# Altium PCB PCB1.PcbDoc (part 3 of 3)
Units mil, origin at the board's own origin, x right, y up, seen from the top; angles counter-clockwise.
Board outline 2780 x 2325 mil, 2 copper layers (Top Layer, Bottom Layer); 78 components, 66 nets, 284 pads, 83 vias.
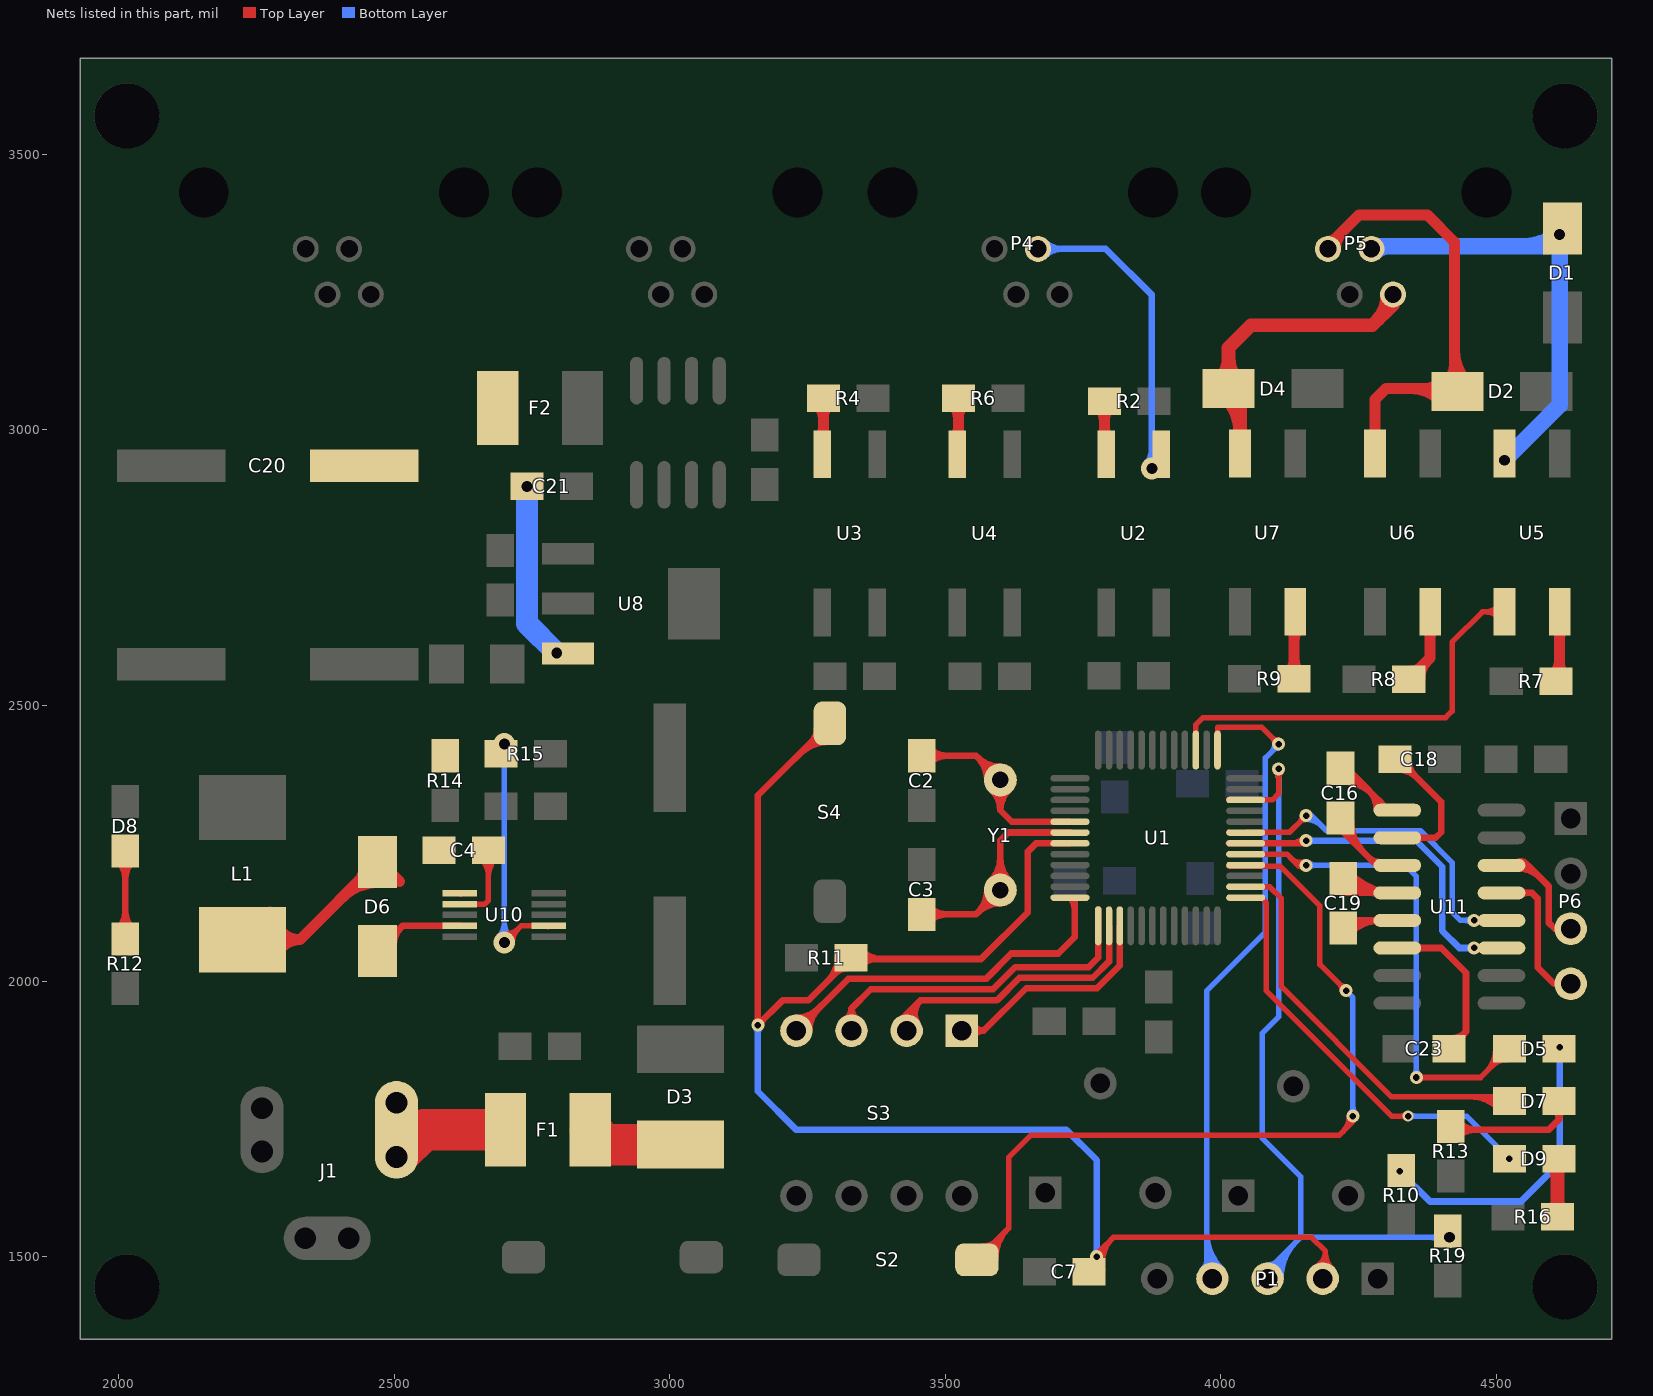
[diagram p3: the nets of this part, all layers, seen from the top]

## Via types
v1: diameter 39.37, hole 19.68, Top Layer to Bottom Layer, 56 vias
v2: diameter 23.62, hole 11.81, Top Layer to Bottom Layer, 18 vias
v3: diameter 19.68, hole 11.81, Top Layer to Bottom Layer, 8 vias
v4: diameter 23.62, hole 11.81, Top Layer to Bottom Layer, tented bottom, 1 vias

## Nets (pads, with @x,y where several pads share a name; then routed paths per layer and width w, separated by ;. In a path a pad name is that pad's centre, name@x,y a point inside that pad or via, vN(x,y) a via of type N, cw(c..) or ccw(c..) an arc to the next point about the centre after c; other vN are vias at no path point) (continued)
KEY2: S2.1 U1.28 | length 2150.2
  Top Layer w10: S2.1@3557.61,1494.12 3615,1551.5 ; U1.28@4015,2208.7 4107.63,2208.7 4180,2136.33 4180,2030 v2(4227.5,1982.5) ; v2(4240,1755) 4240,1745 4215,1720 3655,1720 3615,1680 3615,1551.5 ; S2.1@3567.46,1518.65 ccw(c3567.46,1554.1) 3592.53,1529.03 ; S2.1@3567.46,1518.65 ccw(c3567.46,1554.1) 3592.53,1529.03 ; S2.1@3567.46,1518.65 ccw(c3567.46,1554.1) 3592.53,1529.03 ; S2.1@3581.98,1494.37 cw(c3637.84,1495.34) 3598.34,1534.84 ; S2.1@3581.98,1494.37 cw(c3637.84,1495.34) 3598.34,1534.84 ; S2.1@3581.98,1494.37 cw(c3637.84,1495.34) 3598.34,1534.84 ; S2.1@3591.98,1494.54 cw(c3670.59,1495.91) 3615,1551.5 ; S2.1@3591.98,1494.54 cw(c3670.59,1495.91) 3615,1551.5 ; S2.1@3591.98,1494.54 cw(c3670.59,1495.91) 3615,1551.5 ; U1.28@4075.47,2211.11 ccw(c4081.32,2216.96) 4081.32,2208.69 ; U1.28@4075.47,2211.11 ccw(c4081.32,2216.96) 4081.32,2208.69 ; U1.28@4075.47,2211.11 ccw(c4081.32,2216.96) 4081.32,2208.69 ; 4215.87,1994.13 cw(c4204.25,1982.5) v2@4220.69,1982.5 ; 4215.87,1994.13 ccw(c4227.5,2005.75) v2@4227.5,1989.31 ; 4215.87,1994.13 ccw(c4227.5,2005.75) v2@4227.5,1989.31 ; 4215.87,1994.13 cw(c4204.25,1982.5) v2@4220.69,1982.5 ; 4215.87,1994.13 ccw(c4227.5,2005.75) v2@4227.5,1989.31 ; 4215.87,1994.13 cw(c4204.25,1982.5) v2@4220.69,1982.5 ; 4221.3,1726.3 ccw(c4192.6,1755) v2@4233.19,1755 ; 4221.3,1726.3 ccw(c4192.6,1755) v2@4233.19,1755 ; 4221.3,1726.3 ccw(c4192.6,1755) v2@4233.19,1755
  Bottom Layer w10: v2(4227.5,1982.5) 4240,1970 v2(4240,1755) ; v2@4235.18,1759.82 ccw(c4223.56,1771.44) 4240,1771.44 ; v2@4235.18,1759.82 ccw(c4223.56,1771.44) 4240,1771.44 ; v2@4235.18,1759.82 ccw(c4223.56,1771.44) 4240,1771.44 ; 4240,1771.44 ccw(c4256.44,1771.44) v2@4244.82,1759.82 ; 4240,1771.44 ccw(c4256.44,1771.44) v2@4244.82,1759.82 ; 4240,1771.44 ccw(c4256.44,1771.44) v2@4244.82,1759.82
LED1: D5.2 U1.29 | length 1672.1
  Top Layer w10: 4091.17,2230.16 4015,2230 4119.84,2230.16 4140,2210 v2@4150,2210 ; v4(4355,1825) 4471.55,1825 D5.2@4523.86,1877.31 ; 4127.34,2222.66 ccw(c4145.18,2240.5) v2@4152.91,2216.48 ; 4127.34,2222.66 ccw(c4145.18,2240.5) v2@4152.91,2216.48 ; 4127.34,2222.66 ccw(c4145.18,2240.5) v2@4152.91,2216.48 ; 4138.92,2211.09 ccw(c4150.82,2222.99) v2@4155.98,2206.96 ; 4138.92,2211.09 ccw(c4150.82,2222.99) v2@4155.98,2206.96 ; 4138.92,2211.09 ccw(c4150.82,2222.99) v2@4155.98,2206.96 ; v4@4359.82,1820.18 cw(c4371.44,1808.56) 4371.44,1825 ; v4@4359.82,1820.18 cw(c4371.44,1808.56) 4371.44,1825 ; v4@4359.82,1820.18 cw(c4371.44,1808.56) 4371.44,1825 ; v4@4359.82,1829.82 ccw(c4371.44,1841.44) 4371.44,1825 ; v4@4359.82,1829.82 ccw(c4371.44,1841.44) 4371.44,1825 ; v4@4359.82,1829.82 ccw(c4371.44,1841.44) 4371.44,1825 ; 4481.18,1834.64 ccw(c4438.5,1877.31) D5.2@4498.86,1877.31 ; 4481.18,1834.64 ccw(c4438.5,1877.31) D5.2@4498.86,1877.31 ; 4481.18,1834.64 ccw(c4438.5,1877.31) D5.2@4498.86,1877.31 ; 4493.25,1846.71 cw(c4518.86,1821.1) D5.2@4518.86,1857.31 ; 4493.25,1846.71 cw(c4518.86,1821.1) D5.2@4518.86,1857.31 ; 4493.25,1846.71 cw(c4518.86,1821.1) D5.2@4518.86,1857.31 ; 4498.25,1851.71 ccw(c4472.65,1877.31) D5.2@4508.86,1877.31 ; 4498.25,1851.71 ccw(c4472.65,1877.31) D5.2@4508.86,1877.31 ; 4498.25,1851.71 ccw(c4472.65,1877.31) D5.2@4508.86,1877.31
  Bottom Layer w10: v2@4150,2210 v2(4155,2210) 4335,2210 4355,2190 v4(4355,1825) ; v2@4159.82,2205.18 cw(c4171.44,2193.56) 4171.44,2210 ; v2@4159.82,2205.18 cw(c4171.44,2193.56) 4171.44,2210 ; v2@4159.82,2205.18 cw(c4171.44,2193.56) 4171.44,2210 ; v2@4159.82,2214.82 ccw(c4171.44,2226.44) 4171.44,2210 ; v2@4159.82,2214.82 ccw(c4171.44,2226.44) 4171.44,2210 ; v2@4159.82,2214.82 ccw(c4171.44,2226.44) 4171.44,2210 ; v4@4350.18,1829.82 ccw(c4338.56,1841.44) 4355,1841.44 ; v4@4350.18,1829.82 ccw(c4338.56,1841.44) 4355,1841.44 ; v4@4350.18,1829.82 ccw(c4338.56,1841.44) 4355,1841.44 ; 4355,1841.44 ccw(c4371.44,1841.44) v4@4359.82,1829.82 ; 4355,1841.44 ccw(c4371.44,1841.44) v4@4359.82,1829.82 ; 4355,1841.44 ccw(c4371.44,1841.44) v4@4359.82,1829.82
LED2: D7.2 U1.26 | length 1109.9
  Top Layer w10: U1.26@4015,2171.1 4088.9,2171.1 4110,2150 4110,1990 4310,1790 4516.17,1790 D7.2@4523.86,1782.31 ; 4452.02,1790 cw(c4452.02,1715.47) D7.2@4504.72,1768.17 ; 4452.02,1790 cw(c4452.02,1715.47) D7.2@4504.72,1768.17 ; 4452.02,1790 cw(c4452.02,1715.47) D7.2@4504.72,1768.17 ; 4476.16,1790 cw(c4476.16,1739.61) D7.2@4511.79,1775.24 ; 4476.16,1790 cw(c4476.16,1739.61) D7.2@4511.79,1775.24 ; 4476.16,1790 cw(c4476.16,1739.61) D7.2@4511.79,1775.24 ; 4489.13,1790 ccw(c4489.13,1812.04) D7.2@4504.72,1796.45 ; 4489.13,1790 ccw(c4489.13,1812.04) D7.2@4504.72,1796.45 ; 4489.13,1790 ccw(c4489.13,1812.04) D7.2@4504.72,1796.45
LED3: D9.2 U1.25 | length 933.9
  Top Layer w10: U1.25@4045.31,2151.42 4073.58,2151.42 4083,2142 4083,1982 4310,1755 v3(4340,1755) ; 4328.31,1755 cw(c4328.31,1743.31) v3@4336.58,1751.58 ; 4328.31,1755 ccw(c4328.31,1766.69) v3@4336.58,1758.42 ; 4328.31,1755 ccw(c4328.31,1766.69) v3@4336.58,1758.42 ; 4328.31,1755 cw(c4328.31,1743.31) v3@4336.58,1751.58 ; 4328.31,1755 ccw(c4328.31,1766.69) v3@4336.58,1758.42 ; 4328.31,1755 cw(c4328.31,1743.31) v3@4336.58,1751.58
  Bottom Layer w10: v3(4340,1755) 4446.17,1755 v3(4523.86,1677.31) ; v3@4343.42,1751.58 cw(c4351.69,1743.31) 4351.69,1755 ; v3@4343.42,1751.58 cw(c4351.69,1743.31) 4351.69,1755 ; v3@4343.42,1751.58 cw(c4351.69,1743.31) 4351.69,1755 ; v3@4343.42,1758.42 ccw(c4351.69,1766.69) 4351.69,1755 ; v3@4343.42,1758.42 ccw(c4351.69,1766.69) 4351.69,1755 ; v3@4343.42,1758.42 ccw(c4351.69,1766.69) 4351.69,1755 ; 4515.59,1685.58 cw(c4507.32,1677.31) v3@4519.02,1677.31 ; 4515.59,1685.58 ccw(c4523.86,1693.85) v3@4523.86,1682.16 ; 4515.59,1685.58 ccw(c4523.86,1693.85) v3@4523.86,1682.16 ; 4515.59,1685.58 cw(c4507.32,1677.31) v3@4519.02,1677.31 ; 4515.59,1685.58 ccw(c4523.86,1693.85) v3@4523.86,1682.16 ; 4515.59,1685.58 cw(c4507.32,1677.31) v3@4519.02,1677.31
MODE1: S3.4 U1.12 | length 1034.3
  Top Layer w12: S3.4@3230,1910 3324,2004 3574,2004 3620,2050 3705,2050 3735,2080 3735,2142.83 U1.12@3726.41,2151.42 ; S3.4@3230,1933.53 ccw(c3230,1990.33) 3270.16,1950.16 ; S3.4@3230,1933.53 ccw(c3230,1990.33) 3270.16,1950.16 ; S3.4@3230,1933.53 ccw(c3230,1990.33) 3270.16,1950.16 ; S3.4@3253.53,1910 cw(c3310.33,1910) 3270.16,1950.16 ; S3.4@3253.53,1910 cw(c3310.33,1910) 3270.16,1950.16 ; S3.4@3253.53,1910 cw(c3310.33,1910) 3270.16,1950.16 ; U1.12@3726.44,2151.51 cw(c3721.97,2139.27) 3735,2139.27 ; U1.12@3726.44,2151.51 cw(c3721.97,2139.27) 3735,2139.27 ; U1.12@3726.44,2151.51 cw(c3721.97,2139.27) 3735,2139.27 ; U1.12@3726.48,2151.49 cw(c3705.9,2130.91) 3735,2130.91 ; U1.12@3726.48,2151.49 cw(c3705.9,2130.91) 3735,2130.91 ; U1.12@3726.48,2151.49 cw(c3705.9,2130.91) 3735,2130.91
MODE2: S3.3 U1.13 | length 755.2
  Top Layer w12: S3.3@3330,1910 3330,1950 ; U1.13@3777.59,2130 3777.59,2042.59 3760,2025 3626.86,2025 3586.86,1985 3365,1985 3330,1950 ; S3.3@3318.57,1930.56 ccw(c3307.76,1950) 3330,1950 ; S3.3@3318.57,1930.56 ccw(c3307.76,1950) 3330,1950 ; S3.3@3318.57,1930.56 ccw(c3307.76,1950) 3330,1950 ; 3330,1950 ccw(c3352.24,1950) S3.3@3341.43,1930.56 ; 3330,1950 ccw(c3352.24,1950) S3.3@3341.43,1930.56 ; 3330,1950 ccw(c3352.24,1950) S3.3@3341.43,1930.56
MODE3: S3.2 U1.14 | length 872.1
  Top Layer w12: S3.2@3425,1915 3425,1935 3455,1965 ; U1.14@3797.43,2100.08 3797.43,2035.57 3767.87,2006 3634.73,2006 3593.73,1965 3455,1965 ; S3.2@3429.6,1909.75 cw(c3452.93,1924.15) 3433.54,1943.54 ; S3.2@3429.6,1909.75 cw(c3452.93,1924.15) 3433.54,1943.54 ; S3.2@3429.6,1909.75 cw(c3452.93,1924.15) 3433.54,1943.54 ; S3.2@3439.81,1916.05 cw(c3466.2,1932.34) 3444.27,1954.27 ; S3.2@3439.81,1916.05 cw(c3466.2,1932.34) 3444.27,1954.27 ; S3.2@3439.81,1916.05 cw(c3466.2,1932.34) 3444.27,1954.27 ; S3.2@3450.02,1922.36 cw(c3479.47,1940.53) 3455,1965 ; S3.2@3450.02,1922.36 cw(c3479.47,1940.53) 3455,1965 ; S3.2@3450.02,1922.36 cw(c3479.47,1940.53) 3455,1965
MODE4: S3.1 U1.15 | length 549.7
  Top Layer w12: S3.1@3530,1910 3570,1910 ; U1.15@3816.87,2100.15 3816.87,2028.13 3775.74,1987 3647,1987 3570,1910 ; S3.1@3550.56,1898.57 cw(c3570,1887.76) 3570,1910 ; S3.1@3550.56,1898.57 cw(c3570,1887.76) 3570,1910 ; S3.1@3550.56,1898.57 cw(c3570,1887.76) 3570,1910 ; S3.1@3550.56,1921.43 ccw(c3570,1932.24) 3570,1910 ; S3.1@3550.56,1921.43 ccw(c3570,1932.24) 3570,1910 ; S3.1@3550.56,1921.43 ccw(c3570,1932.24) 3570,1910
NetC2_1: C2.1 U1.5 Y1.1 | length 1120.6
  Top Layer w12: C2.1@3457.69,2408.86 3556.14,2408.86 Y1.1@3600,2365 ; Y1.1@3585.95,2379.05 Y1.1@3600,2379.05 ; Y1.1@3600,2380 Y1.1@3600,2365 ; U1.5@3726.41,2289.21 3620.79,2289.21 3600,2310 ; C2.1@3471.12,2395.42 cw(c3503.56,2362.99) 3503.56,2408.86 ; C2.1@3471.12,2395.42 cw(c3503.56,2362.99) 3503.56,2408.86 ; C2.1@3471.12,2395.42 cw(c3503.56,2362.99) 3503.56,2408.86 ; C2.1@3471.12,2422.29 ccw(c3503.56,2454.73) 3503.56,2408.86 ; C2.1@3471.12,2422.29 ccw(c3503.56,2454.73) 3503.56,2408.86 ; C2.1@3471.12,2422.29 ccw(c3503.56,2454.73) 3503.56,2408.86 ; 3559.03,2405.97 cw(c3518.06,2365) Y1.1@3576,2365 ; 3559.03,2405.97 ccw(c3600,2446.94) Y1.1@3600,2389 ; 3559.03,2405.97 ccw(c3600,2446.94) Y1.1@3600,2389 ; 3559.03,2405.97 cw(c3518.06,2365) Y1.1@3576,2365 ; 3559.03,2405.97 ccw(c3600,2446.94) Y1.1@3600,2389 ; 3559.03,2405.97 cw(c3518.06,2365) Y1.1@3576,2365 ; Y1.1@3583.68,2347.4 cw(c3548.99,2310) 3600,2310 ; Y1.1@3583.68,2347.4 cw(c3548.99,2310) 3600,2310 ; Y1.1@3583.68,2347.4 cw(c3548.99,2310) 3600,2310 ; 3600,2310 cw(c3651.01,2310) Y1.1@3616.32,2347.4 ; 3600,2310 cw(c3651.01,2310) Y1.1@3616.32,2347.4 ; 3600,2310 cw(c3651.01,2310) Y1.1@3616.32,2347.4 ; 3600,2310 Y1.1@3600,2365
NetC3_1: C3.1 U1.6 Y1.2 | length 1145.5
  Top Layer w12: C3.1@3457.31,2121.14 3556.14,2121.14 Y1.2@3600,2165 3600,2255 3614.53,2269.53 U1.6@3726.41,2269.53 ; C3.1@3470.75,2107.71 cw(c3503.18,2075.27) 3503.18,2121.14 ; C3.1@3470.75,2107.71 cw(c3503.18,2075.27) 3503.18,2121.14 ; C3.1@3470.75,2107.71 cw(c3503.18,2075.27) 3503.18,2121.14 ; C3.1@3470.75,2134.58 ccw(c3503.18,2167.01) 3503.18,2121.14 ; C3.1@3470.75,2134.58 ccw(c3503.18,2167.01) 3503.18,2121.14 ; C3.1@3470.75,2134.58 ccw(c3503.18,2167.01) 3503.18,2121.14 ; 3559.03,2124.03 cw(c3600,2083.06) Y1.2@3600,2141 ; 3559.03,2124.03 ccw(c3518.06,2165) Y1.2@3576,2165 ; 3559.03,2124.03 ccw(c3518.06,2165) Y1.2@3576,2165 ; 3559.03,2124.03 cw(c3600,2083.06) Y1.2@3600,2141 ; 3559.03,2124.03 ccw(c3518.06,2165) Y1.2@3576,2165 ; 3559.03,2124.03 cw(c3600,2083.06) Y1.2@3600,2141 ; Y1.2@3583.03,2181.97 ccw(c3542.06,2222.94) 3600,2222.94 ; Y1.2@3583.03,2181.97 ccw(c3542.06,2222.94) 3600,2222.94 ; Y1.2@3583.03,2181.97 ccw(c3542.06,2222.94) 3600,2222.94 ; 3600,2222.94 ccw(c3657.94,2222.94) Y1.2@3616.97,2181.97 ; 3600,2222.94 ccw(c3657.94,2222.94) Y1.2@3616.97,2181.97 ; 3600,2222.94 ccw(c3657.94,2222.94) Y1.2@3616.97,2181.97
NetC4_1: C4.1 D6.2 L1.1 U10.1 | length 1006.6
  Top Layer w10: U10.1@2619.29,2159.37 U10.1@2621.07,2157.59
  Top Layer w20: L1.1@2225,2075 2329.29,2075 ; L1.1@2245,2080 2245,2095 L1.1@2275.03,2125.03 ; D6.2@2470,2215.71 2329.29,2075 ; D6.2@2475.59,2215.12 2510,2180.71 ; L1.1@2287.26,2050.63 cw(c2329.29,2026.57) 2329.29,2075 ; L1.1@2287.26,2050.63 cw(c2329.29,2026.57) 2329.29,2075 ; L1.1@2287.26,2050.63 cw(c2329.29,2026.57) 2329.29,2075 ; L1.1@2287.26,2099.37 ccw(c2329.29,2123.43) 2329.29,2075 ; L1.1@2287.26,2099.37 ccw(c2329.29,2123.43) 2329.29,2075 ; L1.1@2287.26,2099.37 ccw(c2329.29,2123.43) 2329.29,2075 ; 2406.42,2152.13 cw(c2470,2088.55) D6.2@2470,2178.46 ; 2406.42,2152.13 cw(c2470,2088.55) D6.2@2470,2178.46 ; 2406.42,2152.13 cw(c2470,2088.55) D6.2@2470,2178.46 ; D6.2@2434.93,2180.64 ccw(c2411.68,2203.9) D6.2@2444.57,2203.9 ; D6.2@2434.93,2180.64 ccw(c2411.68,2203.9) D6.2@2444.57,2203.9 ; D6.2@2434.93,2180.64 ccw(c2411.68,2203.9) D6.2@2444.57,2203.9
NetC4_2: C4.2 U10.2 | length 373.6
  Top Layer w10: U10.2@2619.29,2139.68 2664.68,2139.68 2671.14,2146.14 C4.2@2671.14,2237.69 ; C4.2@2657,2223.55 cw(c2622.86,2189.4) 2671.14,2189.4 ; C4.2@2657,2223.55 cw(c2622.86,2189.4) 2671.14,2189.4 ; C4.2@2657,2223.55 cw(c2622.86,2189.4) 2671.14,2189.4 ; 2671.14,2189.4 cw(c2719.43,2189.4) C4.2@2685.28,2223.55 ; 2671.14,2189.4 cw(c2719.43,2189.4) C4.2@2685.28,2223.55 ; 2671.14,2189.4 cw(c2719.43,2189.4) C4.2@2685.28,2223.55
NetC16_1: C16.1 U11.3 | length 519
  Top Layer w12: C16.1@4222.69,2270 4282.69,2210 U11.3@4320.51,2210 ; C16.1@4224.31,2291.14 ccw(c4279.28,2291.14) 4240.41,2252.28 ; C16.1@4224.31,2291.14 ccw(c4279.28,2291.14) 4240.41,2252.28 ; C16.1@4224.31,2291.14 ccw(c4279.28,2291.14) 4240.41,2252.28 ; C16.1@4236.31,2291.14 ccw(c4320.25,2291.14) 4260.9,2231.79 ; C16.1@4236.31,2291.14 ccw(c4320.25,2291.14) 4260.9,2231.79 ; C16.1@4236.31,2291.14 ccw(c4320.25,2291.14) 4260.9,2231.79 ; 4268.29,2224.39 ccw(c4289.02,2245.12) U11.3@4289.02,2215.81 ; 4268.29,2224.39 ccw(c4289.02,2245.12) U11.3@4289.02,2215.81 ; 4268.29,2224.39 ccw(c4289.02,2245.12) U11.3@4289.02,2215.81
NetC16_2: C16.2 U11.1 | length 650.8
  Top Layer w12: C16.2@4215,2381.14 4233.86,2381.14 4305,2310 U11.1@4320.51,2310 ; C16.2@4217.31,2362.14 cw(c4217.31,2276.33) 4277.99,2337.01 ; C16.2@4217.31,2362.14 cw(c4217.31,2276.33) 4277.99,2337.01 ; C16.2@4217.31,2362.14 cw(c4217.31,2276.33) 4277.99,2337.01 ; C16.2@4217.31,2374.14 cw(c4217.31,2317.3) 4257.51,2357.49 ; C16.2@4217.31,2374.14 cw(c4217.31,2317.3) 4257.51,2357.49 ; C16.2@4217.31,2374.14 cw(c4217.31,2317.3) 4257.51,2357.49 ; 4267.79,2347.21 cw(c4230.59,2310) U11.1@4283.2,2310 ; 4267.79,2347.21 cw(c4230.59,2310) U11.1@4283.2,2310 ; 4267.79,2347.21 cw(c4230.59,2310) U11.1@4283.2,2310 ; 4288.28,2326.72 cw(c4271.56,2310) U11.1@4295.2,2310 ; 4288.28,2326.72 cw(c4271.56,2310) U11.1@4295.2,2310 ; 4288.28,2326.72 cw(c4271.56,2310) U11.1@4295.2,2310
NetC18_1: C18.1 U11.2 | length 518
  Top Layer w12: U11.2@4320.51,2260 4390,2260 4400,2270 4400,2325 4341.14,2383.86 C18.1@4341.14,2397.69 ; C18.1@4321.14,2383.69 cw(c4321.14,2334.99) 4355.58,2369.42 ; C18.1@4321.14,2383.69 cw(c4321.14,2334.99) 4355.58,2369.42 ; C18.1@4321.14,2383.69 cw(c4321.14,2334.99) 4355.58,2369.42 ; C18.1@4340.14,2402.69 ccw(c4383.18,2402.69) 4352.75,2372.25 ; C18.1@4340.14,2402.69 ccw(c4383.18,2402.69) 4352.75,2372.25 ; C18.1@4340.14,2402.69 ccw(c4383.18,2402.69) 4352.75,2372.25 ; U11.2@4356.12,2255.89 cw(c4366.04,2245.97) 4366.04,2260 ; U11.2@4356.12,2255.89 cw(c4366.04,2245.97) 4366.04,2260 ; U11.2@4356.12,2255.89 cw(c4366.04,2245.97) 4366.04,2260 ; U11.2@4356.12,2264.11 ccw(c4366.04,2274.03) 4366.04,2260 ; U11.2@4356.12,2264.11 ccw(c4366.04,2274.03) 4366.04,2260 ; U11.2@4356.12,2264.11 ccw(c4366.04,2274.03) 4366.04,2260
NetC19_1: C19.1 U11.5 | length 497.7
  Top Layer w12: C19.1@4216.17,2110 U11.5@4320.51,2110 ; C19.1@4227.26,2096.19 cw(c4260.6,2062.86) 4260.6,2110 ; C19.1@4227.26,2096.19 cw(c4260.6,2062.86) 4260.6,2110 ; C19.1@4227.26,2096.19 cw(c4260.6,2062.86) 4260.6,2110 ; C19.1@4235.75,2087.71 cw(c4289.57,2033.89) U11.5@4289.57,2110 ; C19.1@4235.75,2087.71 cw(c4289.57,2033.89) U11.5@4289.57,2110 ; C19.1@4235.75,2087.71 cw(c4289.57,2033.89) U11.5@4289.57,2110 ; C19.1@4235.75,2114.58 ccw(c4246.8,2125.63) C19.1@4246.8,2110 ; C19.1@4235.75,2114.58 ccw(c4246.8,2125.63) C19.1@4246.8,2110 ; C19.1@4235.75,2114.58 ccw(c4246.8,2125.63) C19.1@4246.8,2110 ; 4274.99,2110 cw(c4274.99,2095.97) U11.5@4284.91,2105.89 ; 4274.99,2110 ccw(c4274.99,2124.03) U11.5@4284.91,2114.11 ; 4274.99,2110 ccw(c4274.99,2124.03) U11.5@4284.91,2114.11 ; 4274.99,2110 cw(c4274.99,2095.97) U11.5@4284.91,2105.89 ; 4274.99,2110 ccw(c4274.99,2124.03) U11.5@4284.91,2114.11 ; 4274.99,2110 cw(c4274.99,2095.97) U11.5@4284.91,2105.89
NetC19_2: C19.2 U11.4 | length 797.9
  Top Layer w12: C19.2@4218.45,2160 U11.4@4320.51,2160 ; C19.2@4218.78,2177.61 ccw(c4261.28,2220.11) 4261.28,2160 ; C19.2@4218.78,2177.61 ccw(c4261.28,2220.11) 4261.28,2160 ; C19.2@4218.78,2177.61 ccw(c4261.28,2220.11) 4261.28,2160 ; C19.2@4227.26,2186.09 ccw(c4290.25,2249.08) U11.4@4290.25,2160 ; C19.2@4227.26,2186.09 ccw(c4290.25,2249.08) U11.4@4290.25,2160 ; C19.2@4227.26,2186.09 ccw(c4290.25,2249.08) U11.4@4290.25,2160 ; C19.2@4235.75,2194.58 ccw(c4319.22,2278.05) U11.4@4319.22,2160 ; C19.2@4235.75,2194.58 ccw(c4319.22,2278.05) U11.4@4319.22,2160 ; C19.2@4235.75,2194.58 ccw(c4319.22,2278.05) U11.4@4319.22,2160 ; 4274.99,2160 cw(c4274.99,2145.97) U11.4@4284.91,2155.89 ; 4274.99,2160 ccw(c4274.99,2174.03) U11.4@4284.91,2164.11 ; 4274.99,2160 ccw(c4274.99,2174.03) U11.4@4284.91,2164.11 ; 4274.99,2160 cw(c4274.99,2145.97) U11.4@4284.91,2155.89 ; 4274.99,2160 ccw(c4274.99,2174.03) U11.4@4284.91,2164.11 ; 4274.99,2160 cw(c4274.99,2145.97) U11.4@4284.91,2155.89
NetC20_1: C20.1 C21.1 F2.2 U8.3 | length 325
  Bottom Layer w40: v1(2741.14,2897.69) 2741.14,2648.86 v1(2795,2595)
NetC23_1: C23.1 U11.6 | length 526.8
  Top Layer w12: U11.6@4320.51,2060 4400,2060 4445,2015 4445,1908.45 ; C23.1@4413.86,1877.31 4445,1908.45 ; U11.6@4356.12,2055.89 cw(c4366.04,2045.97) 4366.04,2060 ; U11.6@4356.12,2055.89 cw(c4366.04,2045.97) 4366.04,2060 ; U11.6@4356.12,2055.89 cw(c4366.04,2045.97) 4366.04,2060 ; U11.6@4356.12,2064.11 ccw(c4366.04,2074.03) 4366.04,2060 ; U11.6@4356.12,2064.11 ccw(c4366.04,2074.03) 4366.04,2060 ; U11.6@4356.12,2064.11 ccw(c4366.04,2074.03) 4366.04,2060 ; C23.1@4418.86,1896.31 ccw(c4418.86,1930.11) 4442.76,1906.21 ; C23.1@4418.86,1896.31 ccw(c4418.86,1930.11) 4442.76,1906.21 ; C23.1@4418.86,1896.31 ccw(c4418.86,1930.11) 4442.76,1906.21 ; C23.1@4437.36,1881.65 cw(c4465.27,1888.18) 4445,1908.45 ; C23.1@4437.36,1881.65 cw(c4465.27,1888.18) 4445,1908.45 ; C23.1@4437.36,1881.65 cw(c4465.27,1888.18) 4445,1908.45
NetD3_1: D3.1 F1.2 | length 174.8
  Top Layer w75: F1.2@2855.77,1730 2882.54,1703.23 D3.1@3019.48,1703.23
NetD5_1: D5.1 R10.2 | length 551.8
  Bottom Layer w12: v3(4325,1655) 4380,1600 4545,1600 4615,1670 v3(4615,1880)
NetD6_1: D6.1 U10.4 | length 468
  Top Layer w12: D6.1@2470,2054.29 2516.02,2100.32 ; U10.4@2619.29,2100.32 2516.02,2100.32 ; D6.1@2476.62,2082.23 ccw(c2485.94,2104.92) D6.1@2503.28,2087.57 ; D6.1@2476.62,2082.23 ccw(c2485.94,2104.92) D6.1@2503.28,2087.57 ; D6.1@2476.62,2082.23 ccw(c2485.94,2104.92) D6.1@2503.28,2087.57 ; D6.1@2481.18,2093.33 ccw(c2493.36,2122.98) 2516.02,2100.31 ; D6.1@2481.18,2093.33 ccw(c2493.36,2122.98) 2516.02,2100.31 ; D6.1@2481.18,2093.33 ccw(c2493.36,2122.98) 2516.02,2100.31 ; D6.1@2499.43,2066.1 cw(c2541.98,2066.1) 2511.89,2096.18 ; D6.1@2499.43,2066.1 cw(c2541.98,2066.1) 2511.89,2096.18 ; D6.1@2499.43,2066.1 cw(c2541.98,2066.1) 2511.89,2096.18
NetD7_1: D7.1 R13.2 | length 580.2
  Top Layer w12: R13.2@4417.31,1736.14 4423.45,1730 4595,1730 4613.86,1748.86 ; D7.1@4613.86,1782.31 4613.86,1748.86 ; R13.2@4430.75,1717.71 cw(c4460.43,1688.03) 4460.43,1730 ; R13.2@4430.75,1717.71 cw(c4460.43,1688.03) 4460.43,1730 ; R13.2@4430.75,1717.71 cw(c4460.43,1688.03) 4460.43,1730 ; R13.2@4430.75,1744.58 ccw(c4465.94,1779.77) 4465.94,1730 ; R13.2@4430.75,1744.58 ccw(c4465.94,1779.77) 4465.94,1730 ; R13.2@4430.75,1744.58 ccw(c4465.94,1779.77) 4465.94,1730 ; D7.1@4604.13,1765.99 cw(c4593.91,1748.86) 4613.86,1748.86 ; D7.1@4604.13,1765.99 cw(c4593.91,1748.86) 4613.86,1748.86 ; D7.1@4604.13,1765.99 cw(c4593.91,1748.86) 4613.86,1748.86 ; 4613.86,1748.86 cw(c4633.81,1748.86) D7.1@4623.59,1765.99 ; 4613.86,1748.86 cw(c4633.81,1748.86) D7.1@4623.59,1765.99 ; 4613.86,1748.86 cw(c4633.81,1748.86) D7.1@4623.59,1765.99
NetD8_1: D8.1 R12.2 | length 588.5
  Top Layer w12: R12.2@2012.31,2080 D8.1@2012.31,2236.14 ; R12.2@1998.88,2094.58 ccw(c1966.44,2127.01) 2012.31,2127.01 ; R12.2@1998.88,2094.58 ccw(c1966.44,2127.01) 2012.31,2127.01 ; R12.2@1998.88,2094.58 ccw(c1966.44,2127.01) 2012.31,2127.01 ; D8.1@1998.88,2217.71 cw(c1966.44,2185.27) 2012.31,2185.27 ; D8.1@1998.88,2217.71 cw(c1966.44,2185.27) 2012.31,2185.27 ; D8.1@1998.88,2217.71 cw(c1966.44,2185.27) 2012.31,2185.27 ; 2012.31,2127.01 ccw(c2058.18,2127.01) R12.2@2025.75,2094.58 ; 2012.31,2127.01 ccw(c2058.18,2127.01) R12.2@2025.75,2094.58 ; 2012.31,2127.01 ccw(c2058.18,2127.01) R12.2@2025.75,2094.58 ; 2012.31,2185.27 cw(c2058.18,2185.27) D8.1@2025.75,2217.71 ; 2012.31,2185.27 cw(c2058.18,2185.27) D8.1@2025.75,2217.71 ; 2012.31,2185.27 cw(c2058.18,2185.27) D8.1@2025.75,2217.71
NetD9_1: D9.1 R16.2 | length 337.4
  Top Layer w12: D9.1@4611.14,1674.6 D9.1@4613.86,1677.31
  Top Layer w25: R16.2@4611.14,1572.69 D9.1@4611.14,1674.6 ; D9.1@4600.02,1668.47 cw(c4573.17,1641.62) 4611.14,1641.62 ; D9.1@4600.02,1668.47 cw(c4573.17,1641.62) 4611.14,1641.62 ; D9.1@4600.02,1668.47 cw(c4573.17,1641.62) 4611.14,1641.62 ; R16.2@4602.3,1581.53 ccw(c4580.96,1602.86) 4611.14,1602.86 ; R16.2@4602.3,1581.53 ccw(c4580.96,1602.86) 4611.14,1602.86 ; R16.2@4602.3,1581.53 ccw(c4580.96,1602.86) 4611.14,1602.86 ; 4611.14,1602.86 ccw(c4641.32,1602.86) R16.2@4619.98,1581.53 ; 4611.14,1602.86 ccw(c4641.32,1602.86) R16.2@4619.98,1581.53 ; 4611.14,1602.86 ccw(c4641.32,1602.86) R16.2@4619.98,1581.53
NetF1_1: F1.1 J1.1 J1.1A J1.1B | length 374.7
  Top Layer w75: J1.1B@2504.37,1779.21 J1.1@2504.37,1730 J1.1A@2504.37,1680.79 2553.58,1730 F1.1@2702.23,1730 2644.16,1730
NetR2_2: R2.2 U2.2 | length 326.8
  Top Layer w20: U2.2@3788.86,2959.14 R2.2@3788.86,3057.31 ; R2.2@3778.25,3041.71 cw(c3752.64,3016.1) 3788.86,3016.1 ; R2.2@3778.25,3041.71 cw(c3752.64,3016.1) 3788.86,3016.1 ; R2.2@3778.25,3041.71 cw(c3752.64,3016.1) 3788.86,3016.1 ; 3788.86,3005.02 ccw(c3813.46,3005.02) U2.2@3796.06,2987.62 ; 3788.86,3005.02 ccw(c3813.46,3005.02) U2.2@3796.06,2987.62 ; 3788.86,3005.02 ccw(c3813.46,3005.02) U2.2@3796.06,2987.62 ; 3788.86,3016.1 cw(c3825.07,3016.1) R2.2@3799.46,3041.71 ; 3788.86,3016.1 cw(c3825.07,3016.1) R2.2@3799.46,3041.71 ; 3788.86,3016.1 cw(c3825.07,3016.1) R2.2@3799.46,3041.71
NetR4_2: R4.2 U3.2 | length 317.8
  Top Layer w20: U3.2@3278.86,2957.86 R4.2@3278.86,3057.31 ; R4.2@3268.25,3046.71 cw(c3242.64,3021.1) 3278.86,3021.1 ; R4.2@3268.25,3046.71 cw(c3242.64,3021.1) 3278.86,3021.1 ; R4.2@3268.25,3046.71 cw(c3242.64,3021.1) 3278.86,3021.1 ; U3.2@3272.94,2987.62 ccw(c3258.64,3001.92) 3278.86,3001.92 ; U3.2@3272.94,2987.62 ccw(c3258.64,3001.92) 3278.86,3001.92 ; U3.2@3272.94,2987.62 ccw(c3258.64,3001.92) 3278.86,3001.92 ; 3278.86,3021.1 cw(c3315.07,3021.1) R4.2@3289.46,3046.71 ; 3278.86,3021.1 cw(c3315.07,3021.1) R4.2@3289.46,3046.71 ; 3278.86,3021.1 cw(c3315.07,3021.1) R4.2@3289.46,3046.71
NetR6_2: R6.2 U4.2 | length 311.5
  Top Layer w20: U4.2@3523.86,2964.14 R6.2@3523.86,3057.31 ; R6.2@3513.25,3046.71 cw(c3487.64,3021.1) 3523.86,3021.1 ; R6.2@3513.25,3046.71 cw(c3487.64,3021.1) 3523.86,3021.1 ; R6.2@3513.25,3046.71 cw(c3487.64,3021.1) 3523.86,3021.1 ; U4.2@3517.94,2987.62 ccw(c3503.64,3001.92) 3523.86,3001.92 ; U4.2@3517.94,2987.62 ccw(c3503.64,3001.92) 3523.86,3001.92 ; U4.2@3517.94,2987.62 ccw(c3503.64,3001.92) 3523.86,3001.92 ; 3523.86,3021.1 cw(c3560.07,3021.1) R6.2@3534.46,3046.71 ; 3523.86,3021.1 cw(c3560.07,3021.1) R6.2@3534.46,3046.71 ; 3523.86,3021.1 cw(c3560.07,3021.1) R6.2@3534.46,3046.71
NetR7_2: R7.2 U5.2 | length 410
  Top Layer w20: R7.2@4608.14,2543.69 4615,2550.55 U5.2@4615,2670 ; R7.2@4602.54,2554.29 ccw(c4572.44,2584.39) 4615,2584.39 ; R7.2@4602.54,2554.29 ccw(c4572.44,2584.39) 4615,2584.39 ; R7.2@4602.54,2554.29 ccw(c4572.44,2584.39) 4615,2584.39 ; U5.2@4608.15,2639.53 cw(c4591.62,2623) 4615,2623 ; U5.2@4608.15,2639.53 cw(c4591.62,2623) 4615,2623 ; U5.2@4608.15,2639.53 cw(c4591.62,2623) 4615,2623 ; 4615,2575.41 ccw(c4644.87,2575.41) R7.2@4623.75,2554.29 ; 4615,2575.41 ccw(c4644.87,2575.41) R7.2@4623.75,2554.29 ; 4615,2575.41 ccw(c4644.87,2575.41) R7.2@4623.75,2554.29 ; 4615,2623 cw(c4638.38,2623) U5.2@4621.85,2639.53 ; 4615,2623 cw(c4638.38,2623) U5.2@4621.85,2639.53 ; 4615,2623 cw(c4638.38,2623) U5.2@4621.85,2639.53
NetR8_2: R8.2 U6.2 | length 419.2
  Top Layer w20: R8.2@4341.14,2547.69 4380,2586.55 U6.2@4380,2670 ; R8.2@4346.14,2562.69 ccw(c4346.14,2586.83) R8.2@4363.21,2569.76 ; R8.2@4346.14,2562.69 ccw(c4346.14,2586.83) R8.2@4363.21,2569.76 ; R8.2@4346.14,2562.69 ccw(c4346.14,2586.83) R8.2@4363.21,2569.76 ; R8.2@4361.14,2547.69 cw(c4409.43,2547.69) 4375.28,2581.83 ; R8.2@4361.14,2547.69 cw(c4409.43,2547.69) 4375.28,2581.83 ; R8.2@4361.14,2547.69 cw(c4409.43,2547.69) 4375.28,2581.83 ; U6.2@4373.15,2639.53 cw(c4356.62,2623) 4380,2623 ; U6.2@4373.15,2639.53 cw(c4356.62,2623) 4380,2623 ; U6.2@4373.15,2639.53 cw(c4356.62,2623) 4380,2623 ; 4380,2623 cw(c4403.38,2623) U6.2@4386.85,2639.53 ; 4380,2623 cw(c4403.38,2623) U6.2@4386.85,2639.53 ; 4380,2623 cw(c4403.38,2623) U6.2@4386.85,2639.53
NetR9_2: R9.2 U7.2 | length 360.1
  Top Layer w20: R9.2@4133.14,2548.69 U7.2@4133.14,2668.14 ; R9.2@4122.54,2559.29 ccw(c4096.93,2584.9) 4133.14,2584.9 ; R9.2@4122.54,2559.29 ccw(c4096.93,2584.9) 4133.14,2584.9 ; R9.2@4122.54,2559.29 ccw(c4096.93,2584.9) 4133.14,2584.9 ; 4133.14,2584.9 ccw(c4169.35,2584.9) R9.2@4143.75,2559.29 ; 4133.14,2584.9 ccw(c4169.35,2584.9) R9.2@4143.75,2559.29 ; 4133.14,2584.9 ccw(c4169.35,2584.9) R9.2@4143.75,2559.29 ; 4133.14,2618.51 cw(c4162.87,2618.51) U7.2@4141.85,2639.53 ; 4133.14,2618.51 cw(c4162.87,2618.51) U7.2@4141.85,2639.53 ; 4133.14,2618.51 cw(c4162.87,2618.51) U7.2@4141.85,2639.53
NetR14_1: R14.1 R15.2 U10.7 | length 957
  Top Layer w10: v1(2700,2070) 2730.32,2100.32 U10.7@2780.71,2100.32 U10.7@2778.93,2098.54 ; v1@2700,2084.69 ccw(c2700,2120.14) 2725.07,2095.07 ; v1@2700,2084.69 ccw(c2700,2120.14) 2725.07,2095.07 ; v1@2700,2084.69 ccw(c2700,2120.14) 2725.07,2095.07 ; v1@2714.69,2070 cw(c2750.14,2070) 2725.07,2095.07 ; v1@2714.69,2070 cw(c2750.14,2070) 2725.07,2095.07 ; v1@2714.69,2070 cw(c2750.14,2070) 2725.07,2095.07
  Bottom Layer w10: v1(2700,2070) v1(2700,2430) ; v1@2689.62,2080.38 ccw(c2664.55,2105.45) 2700,2105.45 ; v1@2689.62,2080.38 ccw(c2664.55,2105.45) 2700,2105.45 ; v1@2689.62,2080.38 ccw(c2664.55,2105.45) 2700,2105.45 ; v1@2689.62,2419.62 cw(c2664.55,2394.55) 2700,2394.55 ; v1@2689.62,2419.62 cw(c2664.55,2394.55) 2700,2394.55 ; v1@2689.62,2419.62 cw(c2664.55,2394.55) 2700,2394.55 ; 2700,2105.45 ccw(c2735.45,2105.45) v1@2710.38,2080.38 ; 2700,2105.45 ccw(c2735.45,2105.45) v1@2710.38,2080.38 ; 2700,2105.45 ccw(c2735.45,2105.45) v1@2710.38,2080.38 ; 2700,2394.55 cw(c2735.45,2394.55) v1@2710.38,2419.62 ; 2700,2394.55 cw(c2735.45,2394.55) v1@2710.38,2419.62 ; 2700,2394.55 cw(c2735.45,2394.55) v1@2710.38,2419.62
OUT1: D1.2 P5.1 U5.4 | length 1089.7
  Bottom Layer w30: P5.1@4273.34,3333.64 4593.64,3333.64 v1(4615,3355) 4615,3045 v1(4515,2945) ; P5.1@4279.44,3322.54 cw(c4306.23,3295.75) 4306.23,3333.64 ; P5.1@4279.44,3322.54 cw(c4306.23,3295.75) 4306.23,3333.64 ; P5.1@4279.44,3322.54 cw(c4306.23,3295.75) 4306.23,3333.64 ; 4552.12,3333.64 ccw(c4552.12,3417.88) v1@4611.69,3358.31 ; 4552.12,3333.64 ccw(c4552.12,3417.88) v1@4611.69,3358.31 ; 4552.12,3333.64 ccw(c4552.12,3417.88) v1@4611.69,3358.31
OUT2: D2.2 P5.2 U6.4 | length 1633.2
  Top Layer w20: P5.2@4194.6,3333.64 4250.96,3390 4375,3390 4424.29,3340.71 4424.29,3075 4300,3075 4280,3055 U6.4@4280,2957.4 ; P5.2@4194.6,3342.26 ccw(c4194.6,3363.08) 4209.32,3348.36 ; P5.2@4194.6,3342.26 ccw(c4194.6,3363.08) 4209.32,3348.36 ; P5.2@4194.6,3342.26 ccw(c4194.6,3363.08) 4209.32,3348.36 ; P5.2@4208.22,3328.64 cw(c4253.18,3328.64) 4221.39,3360.43 ; P5.2@4208.22,3328.64 cw(c4253.18,3328.64) 4221.39,3360.43 ; P5.2@4208.22,3328.64 cw(c4253.18,3328.64) 4221.39,3360.43 ; U6.4@4273.15,2987.87 ccw(c4256.62,3004.41) 4280,3004.41 ; U6.4@4273.15,2987.87 ccw(c4256.62,3004.41) 4280,3004.41 ; U6.4@4273.15,2987.87 ccw(c4256.62,3004.41) 4280,3004.41 ; 4280,3004.41 ccw(c4303.38,3004.41) U6.4@4286.85,2987.87 ; 4280,3004.41 ccw(c4303.38,3004.41) U6.4@4286.85,2987.87 ; 4280,3004.41 ccw(c4303.38,3004.41) U6.4@4286.85,2987.87 ; 4344.01,3075 cw(c4344.01,2996.53) D2.2@4399.5,3052.02 ; 4344.01,3075 cw(c4344.01,2996.53) D2.2@4399.5,3052.02 ; 4344.01,3075 cw(c4344.01,2996.53) D2.2@4399.5,3052.02 ; 4368.15,3075 ccw(c4368.15,3119.33) D2.2@4399.5,3087.98 ; 4368.15,3075 ccw(c4368.15,3119.33) D2.2@4399.5,3087.98 ; 4368.15,3075 ccw(c4368.15,3119.33) D2.2@4399.5,3087.98 ; D2.2@4411.31,3087.98 ccw(c4379.96,3119.33) 4424.29,3119.33 ; D2.2@4411.31,3087.98 ccw(c4379.96,3119.33) 4424.29,3119.33 ; D2.2@4411.31,3087.98 ccw(c4379.96,3119.33) 4424.29,3119.33 ; 4424.29,3143.47 ccw(c4502.76,3143.47) D2.2@4447.28,3087.98 ; 4424.29,3143.47 ccw(c4502.76,3143.47) D2.2@4447.28,3087.98 ; 4424.29,3143.47 ccw(c4502.76,3143.47) D2.2@4447.28,3087.98
OUT3: D4.2 P5.3 U7.4 | length 1161.5
  Top Layer w25: D4.2@4014.29,3075 4014.29,3149.29 4055,3190 4275,3190 4312.71,3227.71 P5.3@4312.71,3250.96 ; U7.4@4035,2957.4 D4.2@4035,3075 ; D4.2@3998.08,3091.22 ccw(c3958.93,3130.37) 4014.29,3130.37 ; D4.2@3998.08,3091.22 ccw(c3958.93,3130.37) 4014.29,3130.37 ; D4.2@3998.08,3091.22 ccw(c3958.93,3130.37) 4014.29,3130.37 ; D4.2@4009.89,3058.78 cw(c3949.26,2998.15) U7.4@4035,2998.15 ; D4.2@4009.89,3058.78 cw(c3949.26,2998.15) U7.4@4035,2998.15 ; D4.2@4009.89,3058.78 cw(c3949.26,2998.15) U7.4@4035,2998.15 ; 4014.29,3130.37 ccw(c4069.66,3130.37) D4.2@4030.51,3091.22 ; 4014.29,3130.37 ccw(c4069.66,3130.37) D4.2@4030.51,3091.22 ; 4014.29,3130.37 ccw(c4069.66,3130.37) D4.2@4030.51,3091.22 ; 4284.13,3199.13 ccw(c4241.66,3241.6) P5.3@4301.61,3245.28 ; 4284.13,3199.13 ccw(c4241.66,3241.6) P5.3@4301.61,3245.28 ; 4284.13,3199.13 ccw(c4241.66,3241.6) P5.3@4301.61,3245.28
PC_RXD: P6.3 U11.14 | length 585.2
  Top Layer w12: U11.14@4509.49,2210 4557.33,2210 4595,2172.33 4595,2106 4606,2095 P6.3@4635,2095 ; U11.14@4538,2215.42 cw(c4544.57,2203.48) 4554.21,2213.12 ; U11.14@4538,2215.42 cw(c4544.57,2203.48) 4554.21,2213.12 ; U11.14@4538,2215.42 cw(c4544.57,2203.48) 4554.21,2213.12 ; U11.14@4540.98,2204.19 cw(c4540.98,2150.7) 4578.81,2188.52 ; U11.14@4540.98,2204.19 cw(c4540.98,2150.7) 4578.81,2188.52 ; U11.14@4540.98,2204.19 cw(c4540.98,2150.7) 4578.81,2188.52 ; U11.14@4540.98,2216.19 cw(c4540.98,2191.67) 4558.32,2209.01 ; U11.14@4540.98,2216.19 cw(c4540.98,2191.67) 4558.32,2209.01 ; U11.14@4540.98,2216.19 cw(c4540.98,2191.67) 4558.32,2209.01 ; U11.14@4543.79,2204.91 cw(c4552.59,2188.92) 4565.5,2201.83 ; U11.14@4543.79,2204.91 cw(c4552.59,2188.92) 4565.5,2201.83 ; U11.14@4543.79,2204.91 cw(c4552.59,2188.92) 4565.5,2201.83 ; U11.14@4545.09,2205.89 cw(c4555.01,2195.97) 4555.01,2210 ; U11.14@4545.09,2205.89 cw(c4555.01,2195.97) 4555.01,2210 ; U11.14@4545.09,2205.89 cw(c4555.01,2195.97) 4555.01,2210 ; U11.14@4545.09,2214.11 ccw(c4555.01,2224.03) 4555.01,2210 ; U11.14@4545.09,2214.11 ccw(c4555.01,2224.03) 4555.01,2210 ; U11.14@4545.09,2214.11 ccw(c4555.01,2224.03) 4555.01,2210
PC_TXD: P6.4 U11.13 | length 303.2
  Top Layer w12: U11.13@4509.49,2160 4565,2160 4575,2150 4575,2025 4605,1995 ; U11.13@4545.09,2155.89 cw(c4555.01,2145.97) 4555.01,2160 ; U11.13@4545.09,2155.89 cw(c4555.01,2145.97) 4555.01,2160 ; U11.13@4545.09,2155.89 cw(c4555.01,2145.97) 4555.01,2160 ; U11.13@4545.09,2164.11 ccw(c4555.01,2174.03) 4555.01,2160 ; U11.13@4545.09,2164.11 ccw(c4555.01,2174.03) 4555.01,2160 ; U11.13@4545.09,2164.11 ccw(c4555.01,2174.03) 4555.01,2160
RST: C7.2 P1.2 R11.1 S4.1 U1.7 | length 4775.5
  Top Layer w10: v2@3772.5,1502.5 3805,1535 ; P1.2@4190,1465 4190,1510 ; C7.2@3766.14,1472.69 cw(c3805.63,1479.06) v2@3777.34,1507.35 ; C7.2@3766.14,1472.69 cw(c3805.63,1479.06) v2@3777.34,1507.35 ; C7.2@3766.14,1472.69 cw(c3805.63,1479.06) v2@3777.34,1507.35 ; C7.2@3776.01,1474.28 cw(c3829.43,1482.91) 3791.17,1521.17 ; C7.2@3776.01,1474.28 cw(c3829.43,1482.91) 3791.17,1521.17 ; C7.2@3776.01,1474.28 cw(c3829.43,1482.91) 3791.17,1521.17 ; v2@3781.81,1500 cw(c3810.33,1500) 3790.16,1520.16 ; v2@3781.81,1500 cw(c3810.33,1500) 3790.16,1520.16 ; v2@3781.81,1500 cw(c3810.33,1500) 3790.16,1520.16 ; C7.2@3785.89,1475.88 cw(c3853.24,1486.75) 3805,1535 ; C7.2@3785.89,1475.88 cw(c3853.24,1486.75) 3805,1535 ; C7.2@3785.89,1475.88 cw(c3853.24,1486.75) 3805,1535 ; 3805,1535 4165,1535 4190,1510 ; P1.2@4173.16,1481.48 ccw(c4157.43,1510) 4190,1510 ; P1.2@4173.16,1481.48 ccw(c4157.43,1510) 4190,1510 ; P1.2@4173.16,1481.48 ccw(c4157.43,1510) 4190,1510 ; P1.2@4177.99,1472.72 ccw(c4166.77,1493.07) 4190,1493.07 ; P1.2@4177.99,1472.72 ccw(c4166.77,1493.07) 4190,1493.07 ; P1.2@4177.99,1472.72 ccw(c4166.77,1493.07) 4190,1493.07 ; 4190,1507.14 ccw(c4232.14,1507.14) P1.2@4202.34,1477.34 ; 4190,1507.14 ccw(c4232.14,1507.14) P1.2@4202.34,1477.34 ; 4190,1507.14 ccw(c4232.14,1507.14) P1.2@4202.34,1477.34
  Top Layer w12: S4.1@3290.88,2467.61 3160,2336.73 v2(3160,1920) 3205,1965 3251.55,1965 R11.1@3328.86,2042.31 ; R11.1@3331.55,2040 3565,2040 3650,2125 3650,2235 3664.84,2249.84 U1.7@3726.41,2249.84 ; v2@3155.89,1924.11 ccw(c3145.97,1934.03) 3160,1934.03 ; v2@3155.89,1924.11 ccw(c3145.97,1934.03) 3160,1934.03 ; v2@3155.89,1924.11 ccw(c3145.97,1934.03) 3160,1934.03 ; v2@3160,1925.81 ccw(c3160,1939.84) 3169.92,1929.92 ; v2@3160,1925.81 ccw(c3160,1939.84) 3169.92,1929.92 ; v2@3160,1925.81 ccw(c3160,1939.84) 3169.92,1929.92 ; 3160,1934.03 ccw(c3174.03,1934.03) v2@3164.11,1924.11 ; 3160,1934.03 ccw(c3174.03,1934.03) v2@3164.11,1924.11 ; 3160,1934.03 ccw(c3174.03,1934.03) v2@3164.11,1924.11 ; v2@3165.81,1920 cw(c3179.84,1920) 3169.92,1929.92 ; v2@3165.81,1920 cw(c3179.84,1920) 3169.92,1929.92 ; v2@3165.81,1920 cw(c3179.84,1920) 3169.92,1929.92 ; 3233.92,2410.65 cw(c3290.88,2353.68) S4.1@3290.88,2434.24 ; 3233.92,2410.65 cw(c3290.88,2353.68) S4.1@3290.88,2434.24 ; 3233.92,2410.65 cw(c3290.88,2353.68) S4.1@3290.88,2434.24 ; 3254.4,2431.13 cw(c3290.88,2394.65) S4.1@3290.88,2446.24 ; 3254.4,2431.13 cw(c3290.88,2394.65) S4.1@3290.88,2446.24 ; 3254.4,2431.13 cw(c3290.88,2394.65) S4.1@3290.88,2446.24 ; 3257.68,2434.41 ccw(c3234.32,2457.77) S4.1@3267.35,2457.77 ; 3257.68,2434.41 ccw(c3234.32,2457.77) S4.1@3267.35,2457.77 ; 3257.68,2434.41 ccw(c3234.32,2457.77) S4.1@3267.35,2457.77 ; 3287.89,2001.34 ccw(c3246.92,2042.31) R11.1@3304.86,2042.31 ; 3287.89,2001.34 ccw(c3246.92,2042.31) R11.1@3304.86,2042.31 ; 3287.89,2001.34 ccw(c3246.92,2042.31) R11.1@3304.86,2042.31 ; 3299.96,2013.41 cw(c3323.86,1989.51) R11.1@3323.86,2023.31 ; 3299.96,2013.41 cw(c3323.86,1989.51) R11.1@3323.86,2023.31 ; 3299.96,2013.41 cw(c3323.86,1989.51) R11.1@3323.86,2023.31 ; R11.1@3308.37,2021.83 ccw(c3287.89,2042.31) R11.1@3316.86,2042.31 ; R11.1@3308.37,2021.83 ccw(c3287.89,2042.31) R11.1@3316.86,2042.31 ; R11.1@3308.37,2021.83 ccw(c3287.89,2042.31) R11.1@3316.86,2042.31 ; R11.1@3347.29,2028.88 cw(c3374.14,2002.03) 3374.14,2040 ; R11.1@3347.29,2028.88 cw(c3374.14,2002.03) 3374.14,2040 ; R11.1@3347.29,2028.88 cw(c3374.14,2002.03) 3374.14,2040 ; R11.1@3347.29,2055.75 ccw(c3385.31,2093.77) 3385.31,2040 ; R11.1@3347.29,2055.75 ccw(c3385.31,2093.77) 3385.31,2040 ; R11.1@3347.29,2055.75 ccw(c3385.31,2093.77) 3385.31,2040
  Bottom Layer w12: v2(3160,1920) 3160,1800 3230,1730 3720,1730 3775,1675 v2(3775,1500) ; v2@3155.89,1915.89 cw(c3145.97,1905.97) 3160,1905.97 ; v2@3155.89,1915.89 cw(c3145.97,1905.97) 3160,1905.97 ; v2@3155.89,1915.89 cw(c3145.97,1905.97) 3160,1905.97 ; 3160,1905.97 cw(c3174.03,1905.97) v2@3164.11,1915.89 ; 3160,1905.97 cw(c3174.03,1905.97) v2@3164.11,1915.89 ; 3160,1905.97 cw(c3174.03,1905.97) v2@3164.11,1915.89 ; v2@3770.89,1504.11 ccw(c3760.97,1514.03) 3775,1514.03 ; v2@3770.89,1504.11 ccw(c3760.97,1514.03) 3775,1514.03 ; v2@3770.89,1504.11 ccw(c3760.97,1514.03) 3775,1514.03 ; 3775,1514.03 ccw(c3789.03,1514.03) v2@3779.11,1504.11 ; 3775,1514.03 ccw(c3789.03,1514.03) v2@3779.11,1504.11 ; 3775,1514.03 ccw(c3789.03,1514.03) v2@3779.11,1504.11
RXD: U1.31 U11.12 | length 884.1
  Top Layer w10: U1.31@4015,2270 U1.31@4080.47,2269.53 ; U1.31@4045.78,2270 4125,2270 4150,2295 4150,2305 v2@4160,2305 ; 4143.37,2288.37 cw(c4155,2276.75) v2@4155,2293.19 ; 4143.37,2288.37 ccw(c4131.75,2300) v2@4148.19,2300 ; 4143.37,2288.37 ccw(c4131.75,2300) v2@4148.19,2300 ; 4143.37,2288.37 cw(c4155,2276.75) v2@4155,2293.19 ; 4143.37,2288.37 ccw(c4131.75,2300) v2@4148.19,2300 ; 4143.37,2288.37 cw(c4155,2276.75) v2@4155,2293.19
  Bottom Layer w10: v2@4160,2305 4192.24,2272.76 4362.24,2272.76 4420,2215 4420,2125 4435,2110 v2(4460,2110) ; v2@4155,2293.19 cw(c4155,2252.6) 4183.7,2281.3 ; v2@4155,2293.19 cw(c4155,2252.6) 4183.7,2281.3 ; v2@4155,2293.19 cw(c4155,2252.6) 4183.7,2281.3 ; 4443.56,2110 cw(c4443.56,2093.56) v2@4455.18,2105.18 ; 4443.56,2110 ccw(c4443.56,2126.44) v2@4455.18,2114.82 ; 4443.56,2110 ccw(c4443.56,2126.44) v2@4455.18,2114.82 ; 4443.56,2110 cw(c4443.56,2093.56) v2@4455.18,2105.18 ; 4443.56,2110 ccw(c4443.56,2126.44) v2@4455.18,2114.82 ; 4443.56,2110 cw(c4443.56,2093.56) v2@4455.18,2105.18
  other v2: 4155,2300
S_IN: P4.1 U2.1 | length 912.5
  Bottom Layer w12: P4.1@3668.34,3328.64 3791.36,3328.64 3875,3245 v1(3875,2930) ; P4.1@3680.8,3316.18 cw(c3710.88,3286.09) 3710.88,3328.64 ; P4.1@3680.8,3316.18 cw(c3710.88,3286.09) 3710.88,3328.64 ; P4.1@3680.8,3316.18 cw(c3710.88,3286.09) 3710.88,3328.64 ; P4.1@3680.8,3341.1 ccw(c3710.88,3371.18) 3710.88,3328.64 ; P4.1@3680.8,3341.1 ccw(c3710.88,3371.18) 3710.88,3328.64 ; P4.1@3680.8,3341.1 ccw(c3710.88,3371.18) 3710.88,3328.64 ; v1@3865.32,2939.68 ccw(c3841.96,2963.04) 3875,2963.04 ; v1@3865.32,2939.68 ccw(c3841.96,2963.04) 3875,2963.04 ; v1@3865.32,2939.68 ccw(c3841.96,2963.04) 3875,2963.04 ; 3875,2963.04 ccw(c3908.04,2963.04) v1@3884.68,2939.68 ; 3875,2963.04 ccw(c3908.04,2963.04) v1@3884.68,2939.68 ; 3875,2963.04 ccw(c3908.04,2963.04) v1@3884.68,2939.68
S_OUT: U1.39 U5.1 | length 960.6
  Top Layer w10: U1.39@3954.76,2390 3954.76,2465.26 3967.5,2478 4408,2478 4420,2490 4420,2615 4475,2670 U5.1@4515,2670 ; 4479.55,2670 cw(c4479.55,2634.55) U5.1@4504.62,2659.62 ; 4479.55,2670 ccw(c4479.55,2705.45) U5.1@4504.62,2680.38 ; 4479.55,2670 ccw(c4479.55,2705.45) U5.1@4504.62,2680.38 ; 4479.55,2670 cw(c4479.55,2634.55) U5.1@4504.62,2659.62 ; 4479.55,2670 ccw(c4479.55,2705.45) U5.1@4504.62,2680.38 ; 4479.55,2670 cw(c4479.55,2634.55) U5.1@4504.62,2659.62
SWCLK: P1.4 U1.37 | length 1922.2
  Top Layer w10: U1.37@3995,2390 3995,2461 4074,2461 v2(4105,2430) ; 4093.37,2441.63 cw(c4081.75,2430) v2@4098.19,2430 ; 4093.37,2441.63 ccw(c4105,2453.25) v2@4105,2436.81 ; 4093.37,2441.63 ccw(c4105,2453.25) v2@4105,2436.81 ; 4093.37,2441.63 cw(c4081.75,2430) v2@4098.19,2430 ; 4093.37,2441.63 ccw(c4105,2453.25) v2@4105,2436.81 ; 4093.37,2441.63 cw(c4081.75,2430) v2@4098.19,2430
  Bottom Layer w10: P1.4@3990,1465 3975,1480 3975,1982.72 4081.19,2088.9 4081.19,2404.86 4105,2428.67 v2(4105,2430) ; P1.4@3967.66,1477.34 ccw(c3949.93,1495.07) 3975,1495.07 ; P1.4@3967.66,1477.34 ccw(c3949.93,1495.07) 3975,1495.07 ; P1.4@3967.66,1477.34 ccw(c3949.93,1495.07) 3975,1495.07 ; 3975,1495.07 ccw(c4020.07,1495.07) P1.4@3988.2,1463.2 ; 3975,1495.07 ccw(c4020.07,1495.07) P1.4@3988.2,1463.2 ; 3975,1495.07 ccw(c4020.07,1495.07) P1.4@3988.2,1463.2 ; 3975,1519.21 ccw(c4044.21,1519.21) P1.4@3995.27,1470.27 ; 3975,1519.21 ccw(c4044.21,1519.21) P1.4@3995.27,1470.27 ; 3975,1519.21 ccw(c4044.21,1519.21) P1.4@3995.27,1470.27 ; 3975,1543.36 ccw(c4068.36,1543.36) P1.4@4002.34,1477.34 ; 3975,1543.36 ccw(c4068.36,1543.36) P1.4@4002.34,1477.34 ; 3975,1543.36 ccw(c4068.36,1543.36) P1.4@4002.34,1477.34 ; 4092.44,2416.11 ccw(c4078.54,2430) v2@4098.19,2430 ; 4092.44,2416.11 ccw(c4078.54,2430) v2@4098.19,2430 ; 4092.44,2416.11 ccw(c4078.54,2430) v2@4098.19,2430 ; 4095.64,2419.31 cw(c4105,2409.95) v2@4105,2423.19 ; 4095.64,2419.31 cw(c4105,2409.95) v2@4105,2423.19 ; 4095.64,2419.31 cw(c4105,2409.95) v2@4105,2423.19
SWDIO: P1.3 R19.2 U1.34 | length 2289.3
  Top Layer w10: U1.34@4015,2328.58 4093.58,2328.58 4105,2340 v2(4105,2385) ; v2@4100.18,2380.18 cw(c4088.56,2368.56) 4105,2368.56 ; v2@4100.18,2380.18 cw(c4088.56,2368.56) 4105,2368.56 ; v2@4100.18,2380.18 cw(c4088.56,2368.56) 4105,2368.56 ; 4105,2368.56 cw(c4121.44,2368.56) v2@4109.82,2380.18 ; 4105,2368.56 cw(c4121.44,2368.56) v2@4109.82,2380.18 ; 4105,2368.56 cw(c4121.44,2368.56) v2@4109.82,2380.18
  Bottom Layer w10: P1.3@4086.84,1468.16 4090,1465 4090,1480 4145,1535 ; v2@4099.19,2389.19 4105,2383.38 4105,1935 4075,1905 4075,1715 4145,1645 4145,1535 ; v1@4415,1525 4405,1535 4145,1535 ; P1.3@4085,1484.53 ccw(c4085,1507.53) 4101.26,1491.26 ; P1.3@4085,1484.53 ccw(c4085,1507.53) 4101.26,1491.26 ; P1.3@4085,1484.53 ccw(c4085,1507.53) 4101.26,1491.26 ; P1.3@4089.53,1460 cw(c4136.67,1460) 4103.34,1493.34 ; P1.3@4089.53,1460 cw(c4136.67,1460) 4103.34,1493.34 ; P1.3@4089.53,1460 cw(c4136.67,1460) 4103.34,1493.34 ; P1.3@4099.53,1460 cw(c4170.81,1460) 4120.41,1510.41 ; P1.3@4099.53,1460 cw(c4170.81,1460) 4120.41,1510.41 ; P1.3@4099.53,1460 cw(c4170.81,1460) 4120.41,1510.41 ; v2@4100.18,2380.18 cw(c4088.56,2368.56) 4105,2368.56 ; v2@4100.18,2380.18 cw(c4088.56,2368.56) 4105,2368.56 ; v2@4100.18,2380.18 cw(c4088.56,2368.56) 4105,2368.56 ; 4105,2368.56 cw(c4121.44,2368.56) v2@4109.82,2380.18 ; 4105,2368.56 cw(c4121.44,2368.56) v2@4109.82,2380.18 ; 4105,2368.56 cw(c4121.44,2368.56) v2@4109.82,2380.18 ; P1.3@4109.53,1460 cw(c4204.96,1460) 4137.48,1527.48 ; P1.3@4109.53,1460 cw(c4204.96,1460) 4137.48,1527.48 ; P1.3@4109.53,1460 cw(c4204.96,1460) 4137.48,1527.48 ; 4379.55,1535 cw(c4379.55,1499.55) v1@4404.62,1524.62 ; 4379.55,1535 ccw(c4379.55,1570.45) v1@4404.62,1545.38 ; 4379.55,1535 ccw(c4379.55,1570.45) v1@4404.62,1545.38 ; 4379.55,1535 cw(c4379.55,1499.55) v1@4404.62,1524.62 ; 4379.55,1535 ccw(c4379.55,1570.45) v1@4404.62,1545.38 ; 4379.55,1535 cw(c4379.55,1499.55) v1@4404.62,1524.62
  other v1: 4415,1535
TXD: U1.30 U11.11 | length 793.5
  Top Layer w12: U1.30@4015,2249.84 v2@4155,2249.84 ; 4129.1,2249.84 ccw(c4129.1,2280.67) v2@4150.89,2258.87 ; 4129.1,2249.84 ccw(c4129.1,2280.67) v2@4150.89,2258.87 ; 4129.1,2249.84 ccw(c4129.1,2280.67) v2@4150.89,2258.87
  Bottom Layer w12: v2@4160.24,2254.76 4354.78,2254.76 4402,2207.54 4402,2091 4433,2060 v2(4460,2060) ; v2@4159.11,2250.65 cw(c4169.03,2240.73) 4169.03,2254.76 ; v2@4159.11,2250.65 cw(c4169.03,2240.73) 4169.03,2254.76 ; v2@4159.11,2250.65 cw(c4169.03,2240.73) 4169.03,2254.76 ; v2@4159.11,2258.87 ccw(c4169.03,2268.79) 4169.03,2254.76 ; v2@4159.11,2258.87 ccw(c4169.03,2268.79) 4169.03,2254.76 ; v2@4159.11,2258.87 ccw(c4169.03,2268.79) 4169.03,2254.76 ; 4445.97,2060 cw(c4445.97,2045.97) v2@4455.89,2055.89 ; 4445.97,2060 ccw(c4445.97,2074.03) v2@4455.89,2064.11 ; 4445.97,2060 ccw(c4445.97,2074.03) v2@4455.89,2064.11 ; 4445.97,2060 cw(c4445.97,2045.97) v2@4455.89,2055.89 ; 4445.97,2060 ccw(c4445.97,2074.03) v2@4455.89,2064.11 ; 4445.97,2060 cw(c4445.97,2045.97) v2@4455.89,2055.89
  other v2: 4155,2254.76
pads on no net: P2.0 P3.0 P4.0 P5.0 U1.2 U1.3 U1.4 U1.10 U1.11 U1.18 U1.19 U1.20 U1.21 U1.22 U1.38 U9.5 U10.3 U10.9 U11.7 U11.8 U11.9 U11.10

## Polygon pours and split planes (outlines as drawn)
GND on Top Layer "Top Layer-No Net" (hatched 45Degree grid 20 track 8, remove dead copper, pour order 1001): 1930,3675 1930,1350 4710,1350 4710,2775 3325,2775 3325,3675
GND on Bottom Layer "Top Layer-No Net" (hatched 45Degree grid 20 track 8, remove dead copper): 1930,3675 1930,1350 4710,1350 4710,2777 3330,2777 3328,2779 3328,3675

## Keep-outs
Keep-Out Layer:
  lines w6: 1930,1405 ccw(c1985,1405) 1985,1350 4660,1350 ccw(c4660,1400) 4710,1400 4710,3625 ccw(c4660,3625) 4660,3675 1995,3675 ccw(c1995,3610) 1930,3610 1930,1405

## Other copper
Top Layer:
  rectangle net 3.3V: 3090,2525 3215,2750
  rectangle net GND: 3780,2150 3995,2365
  rectangle net GND: 3260,2180 3485,2355
  rectangle net GND1: 3320,3165 3650,3265
  rectangle net GND1: 3320,3115 3905,3190
  rectangle net 3.3V: 3990,2060 4065,2135
  rectangle net 12V: 2745,2155 2815,2210
  rectangle net GND: 2585,2025 2650,2085
  rectangle net NetR14_1: 2540,2380 2730,2490
  rectangle net GND: 2665,1850 2755,1955
  rectangle net 12V: 2750,2020 2820,2085
  rectangle net NetC20_1: 2345,2870 2730,3105
  rectangle net GND: 1990,2550 2200,3350
  rectangle net GND: 2755,2300 3035,2505
  rectangle net GND: 2210,1500 2415,1885
  rectangle net NetC4_1: 2435,2155 2621.07,2265
  rectangle net GND2: 4105,2915 4230,3115
  rectangle net GND2: 4565,2905 4675,3240
Bottom Layer:
  rectangle net 3.3V: 3275,2535 3895,2720
  rectangle net GND2: 4110,2970 4265,3275
  rectangle net GND: 3780,2150 3995,2365
  rectangle net GND: 2380,1880 2655,2090
  rectangle net GND: 2210,1495 2415,1885

## Silkscreen, mask and mechanical layers (free items; w line width, h text height)
Top Overlay:
  lines w10: 3600,1680 3625,1680 ; 3600,1720 3625,1720 ; 3605,1645 3625,1650 ; 3605,1750 3625,1745 ; 3620,1780 3640,1775 ; 3640,1815 3660,1805 ; 3675,1840 3690,1835 ; 3705,1875 3715,1845 ; 3755,1880 3760,1860 ; 3795,1860 3795,1880 ; 3825,1850 3835,1875 ; 3865,1840 3875,1855 ; 3895,1810 3910,1830 ; 3915,1780 3940,1795 ; 3930,1740 3960,1750 ; 3935,1665 3960,1660 ; 3940,1695 3965,1695 ; 3950,1680 3975,1680 ; 3950,1720 3975,1720 ; 3955,1645 3975,1650 ; 3955,1750 3975,1745 ; 3970,1780 3990,1775 ; 3990,1815 4010,1805 ; 4025,1840 4040,1835 ; 4055,1875 4065,1845 ; 4105,1880 4110,1860 ; 4145,1860 4145,1880 ; 4175,1850 4185,1875 ; 4215,1840 4225,1855 ; 4245,1810 4260,1830 ; 4265,1780 4290,1795 ; 4280,1740 4310,1750
  text "5819" at 4485,3155.41 h39.37 r270
  text "Jumper" at 2050,3070 h59.06 r90
  text "330" at 3685,3015 h39.37 r270
  text "VP230" at 2925,2975 h39.37
  text "521" at 3295,2825 h39.37
  text "521" at 3530,2825 h39.37
  text "521" at 3800,2825 h39.37
  text "G3VM" at 4265,2825 h39.37
  text "G3VM" at 4505,2825 h39.37
  text "G3VM" at 4025,2820 h39.37
  text "ASM1117" at 2890,2800 h39.37 r270
  text "10UF" at 2490,2620 h39.37
  text "200" at 4410,2600 h39.37 r270
  text "10K" at 3170,2595 h39.37 r270
  text "31.6k" at 2440,2525 h39.37 r270
  text "10K" at 2830,2475 h39.37
  text "3232" at 4390,2155 h39.37 r270
  text "5819" at 2405,2115 h39.37
  text "22pf" at 3415,1960 h39.37
  text "330" at 2210,1935 h39.37
  text "330" at 4320,1820 h39.37 r270
  text "4007" at 3010,1765 h39.37
  text "R(4)" at 4470,1505 h39.37 r270
  text "D(3)" at 4520,1505 h39.37 r270
  text "2013/2/17" at 2240,1405 h39.37
  text "10K" at 4365,1360 h39.37
Bottom Overlay:
  drawing of 5190 lines, arcs and shapes, not listed
  text "Output" at 4160,3640 h39.37 r180
  text "CAN_PORT" at 2220.35,3639.45 h39.37 r180
  text "CAN_PORT" at 2845.35,3639.45 h39.37 r180
  text "Input" at 3565,3635 h39.37 r180
  text "GND" at 2780,3350 h39.37 r180
  text "5V" at 3090,3350 h39.37 r180
  text "OUT1" at 4340,3350 h39.37 r180
  text "GND" at 2165,3345 h39.37 r180
  text "5V" at 2500,3345 h39.37 r180
  text "S_IN" at 3755,3345 h39.37 r180
  text "OUT2" at 3990,3345 h39.37 r180
  text "J_IN" at 3380,3340 h39.37 r180
  text "CANL" at 3115,3265 h39.37 r180
  text "CANL" at 2525,3260 h39.37 r180
  text "CANH" at 2775,3260 h39.37 r180
  text "GND1" at 3400,3260 h39.37 r180
  text "GND2" at 4020,3260 h39.37 r180
  text "OUT3" at 4365,3260 h39.37 r180
  text "CANH" at 2155,3255 h39.37 r180
  text "K_IN" at 3775,3255 h39.37 r180
  text "Harbin Institute of Technology" at 2320,3020 h39.37 r90
  text "HRT Racing Team" at 2410,3020 h39.37 r90
  text "Shift Control Board V1.0" at 2500,3020 h39.37 r90
  text "2013/2/17" at 2595,3015 h39.37 r90
  text "3.3V" at 4590,2285 h39.37
  text "GND" at 4580,2175 h39.37
  text "Rx" at 4570,2075 h39.37
  text "Tx" at 4575,1975 h39.37
  text "SWDIO" at 4075,1510 h39.37 r270
  text "RST" at 4150,1510 h39.37 r270
  text "3.3V" at 4275,1505 h39.37 r270
  text "SWCLK" at 3935,1500 h39.37 r270
  text "GND" at 3810,1495 h39.37 r270